# Altium PCB LT4320_2.PcbDoc
Units mil, origin at the board's own origin, x right, y up, seen from the top; angles counter-clockwise.
Board outline 6000 x 4000 mil, 2 copper layers (Top Layer, Bottom Layer); 9 components, 9 nets, 26 pads, 0 vias.
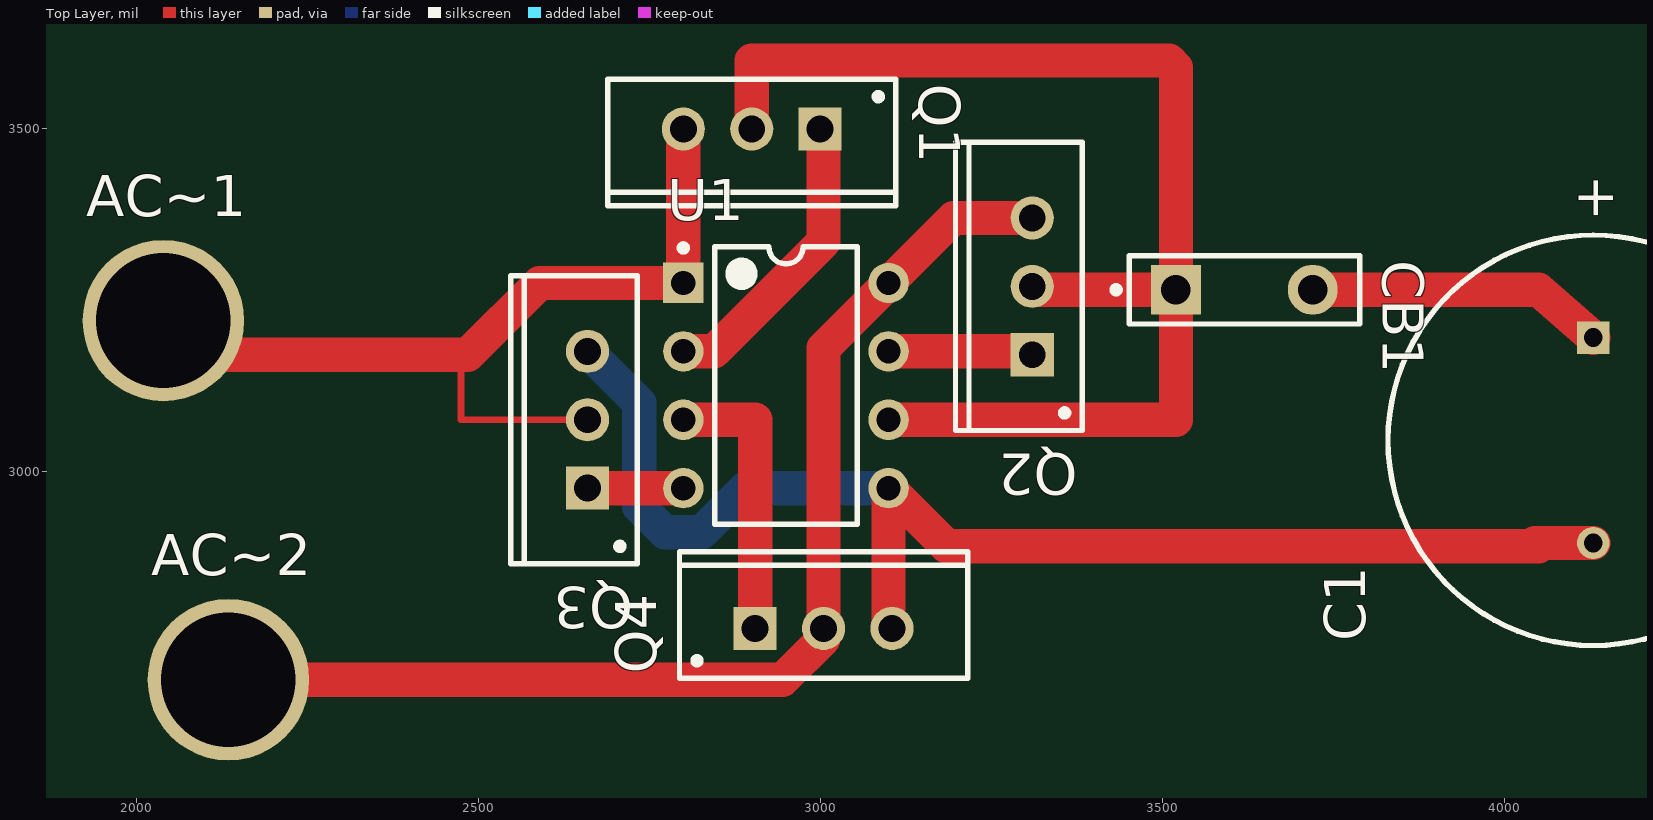
[diagram p0: Top Layer view]
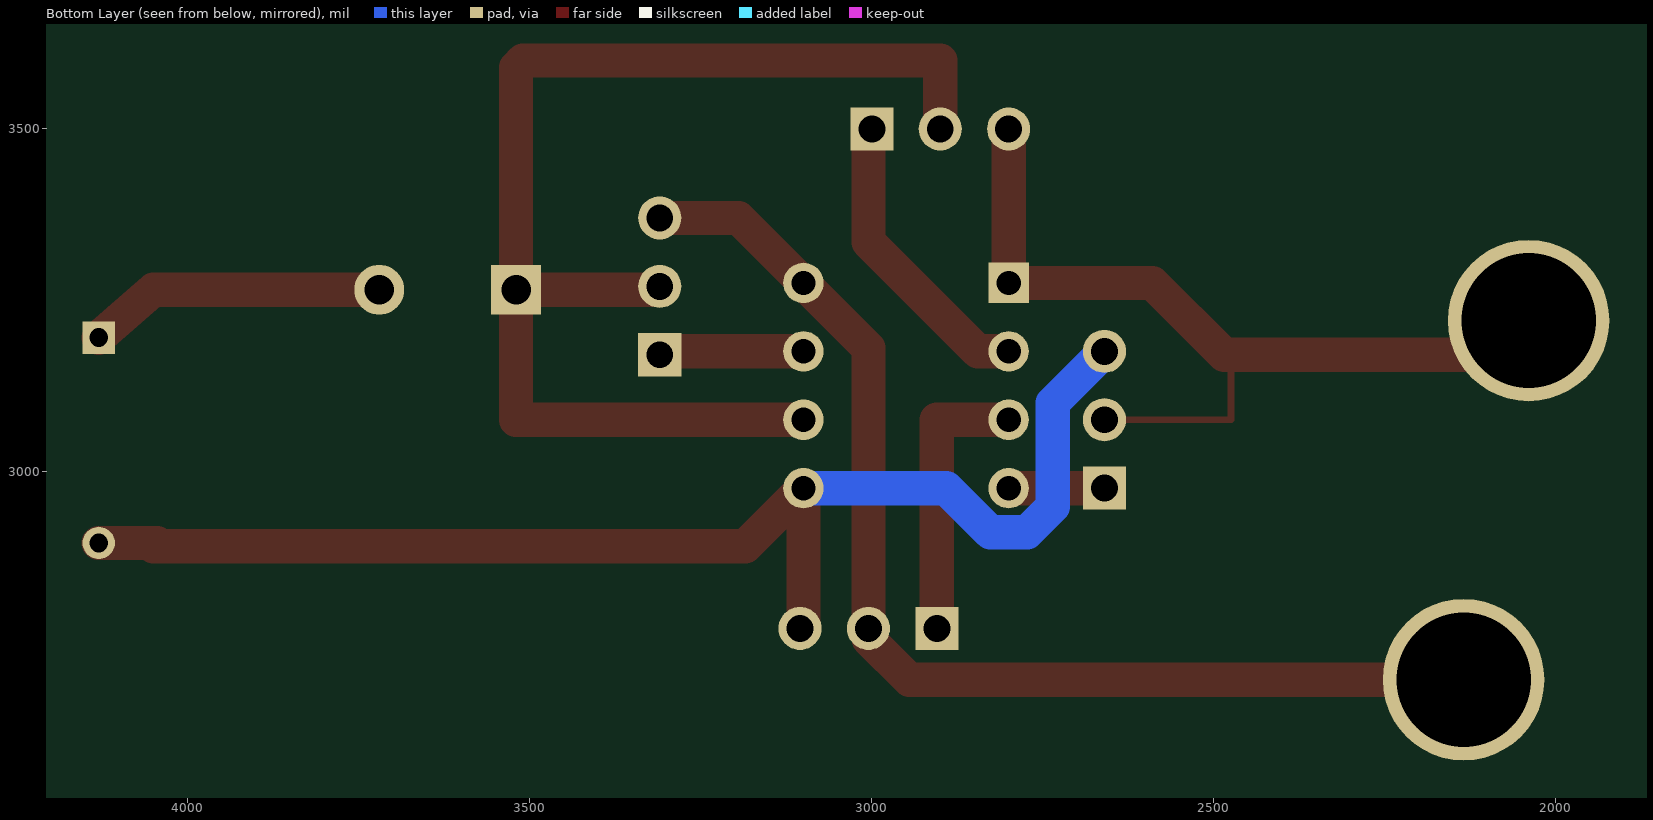
[diagram p1: Bottom Layer view, seen from below]

## Layer stack, top to bottom
Top Layer: signal copper 1.4
Dielectric: dielectric 12.6, FR-4, Dk 4.8
Bottom Layer: signal copper 1.4

## Board outline
1000,1000 7000,1000 7000,5000 1000,5000

## Design rules (kind name [scope] priority, off if disabled: settings)
Clearance [All] p1: gap=10
PolygonConnect [All] p1: connectstyle=Relief reliefconductorwidth=10 reliefentries=4 polygonreliefangle="90 Angle" airgapwidth=10
RoutingVias [All] p1: holewidth=28 width=50 viastyle="Through Hole" minholewidth=28 minwidth=50 maxholewidth=28 maxwidth=50
SolderMaskExpansion [All] p1: expansion=4
Width [All] p1: maxlimit=60 minlimit=10 preferedwidth=10 minimp=50.000000 maximp=50.000000 favimp=50.000000
28 further rules are at their usual default settings.

## Components (designator, comment, footprint, x,y, rotation, side; value= is the part's Value field where it differs from the comment)
AC~1 "PIN" PIN 2040,3220 r0 top
AC~2 "PIN" PIN 2135,2695 r0 top
C1 "Cap Pol1" RB7.6-15 4130,3045 r90 top
CB1 "Circuit Breaker" SPST-2 3620,3265 r0 top
Q1 "MOSFET-N" mos 2925,3490 r270 top
Q2 "MOSFET-N" mos 3300,3245 r180 top
Q3 "MOSFET-N" mos 2650,3050 r180 top
Q4 "MOSFET-N" mos 2980,2780 r90 top
U1 "LT4320-DIP" DIP-8 2950,3125 r0 top

## Footprints (in the part's own frame and the unit in brackets; to place one, negate y for a bottom-side part, rotate by r counter-clockwise, add the part's x,y. Pads: shape width x height; smd on the part's side, far side on the other; paste and mask are expansions set on the pad)
DIP-8 [mm] "DIP; 8 Leads; Row Spacing 7.62 mm; Pitch 2.54 mm"
  rect 1.5x1.5 hole 0.9: 1(-3.81,3.81)
  round 1.5 hole 0.9: 2(-3.81,1.27) 3(-3.81,-1.27) 4(-3.81,-3.81) 5(3.81,-3.81) 6(3.81,-1.27) 7(3.81,1.27) 8(3.81,3.81)
  silkscreen extent -3.93,-5.15 2.65,5.23, body extent -3.6,-5.15 3.6,5.15, height 5.08
mos [mm]
  rect 1.6x1.6 hole 1: 1(-0.254,1.905)
  round 1.6 hole 1: 2(-0.254,-0.635) 3(-0.254,-3.175)
  silkscreen extent -2.1,-5.99 2.6,4.72, body extent -2.15,-6.04 2.65,4.77, height 19.3
PIN [mm]
  round 6 hole 5: 1(0,0)
RB7.6-15 [mm] "Polarized Capacitor (Radial); 2 Leads"
  rect 1.2x1.2 hole 0.7: 1(3.81,0)
  round 1.2 hole 0.7: 2(-3.81,0)
  silkscreen extent -7.62,-7.62 7.62,7.62
SPST-2 [mm] "Switch; 2 Leads"
  rect 1.85x1.85 hole 1.1: 1(-2.54,0)
  round 1.85 hole 1.1: 2(2.54,0)
  silkscreen extent -4.89,-1.27 4.28,1.27

## Part data
C1: "Polarized Capacitor (Radial)"
Q1 Q2 Q3 Q4: "N-Channel MOSFET"

## Nets (pads, with @x,y where several pads share a name; then routed paths per layer and width w, separated by ;. In a path a pad name is that pad's centre, name@x,y a point inside that pad or via, vN(x,y) a via of type N, cw(c..) or ccw(c..) an arc to the next point about the centre after c; other vN are vias at no path point)
12V: C1.1 CB1.2 | length 431.3
  Top Layer w50: CB1.2@3725,3265 4050,3265 C1.1
GND: C1.2 Q3.3 Q4.3 U1.5 | length 1947.2
  Top Layer w50: Q4.3@3100,2770 U1.5 3185,2890 4050,2890 4045,2895 C1.2
  Bottom Layer w50: Q3.3 2735.47,3099.53 2735.47,2948.27 2773.27,2910.47 2826.73,2910.47 2891.26,2975 U1.5
NetAC~1_1: AC~1.1 Q1.3 Q3.2 U1.1 | length 1333.3
  Top Layer w10: 2485,3170 2475,3160 2475,3075 Q3.2
  Top Layer w50: AC~1.1 2090,3170 2485,3170 2590,3275 U1.1 Q1.3
NetAC~2_1: AC~2.1 Q2.3 Q4.2 U1.8 | length 1703.6
  Top Layer w50: AC~2.1 2945,2695 3005,2755 3005,3180 3195,3370 Q2.3
NetQ1_1: Q1.1 U1.2 | length 436.3
  Top Layer w50: U1.2 2845,3175 3005,3335 Q1.1@3005,3500
NetQ2_1: Q2.1 U1.7 | length 210
  Top Layer w50: U1.7 Q2.1@3310,3175
NetQ3_1: Q3.1 U1.4 | length 142.1
  Top Layer w50: Q3.1@2660,2980 2665,2975 U1.4
NetQ4_1: Q4.1 U1.3 | length 410
  Top Layer w50: U1.3 2905,3075 2905,2845 Q4.1
VCC: CB1.1 Q1.2 Q2.2 U1.6 | length 1871.2
  Top Layer w50: Q1.2 2900,3600 3510,3600 3520,3590 CB1.1 ; U1.6 3520,3075 CB1.1 ; Q2.2 3315,3265 CB1.1

## Text inside footprints (layer, text, board x,y; h text height)
C1: Top Overlay "+" at 4159.01,3365.15 h59.06 r90